# Altium PCB PCB_2020-11-14_13-49-03_2020-11-14_14-20-30.pcbdoc
Units mil, origin at the board's own origin, x right, y up, seen from the top; angles counter-clockwise.
Board outline 5264.59 x 3892.5 mil, 2 copper layers (Top Layer, Bottom Layer); 6 components, 25 nets, 12 pads, 42 vias.
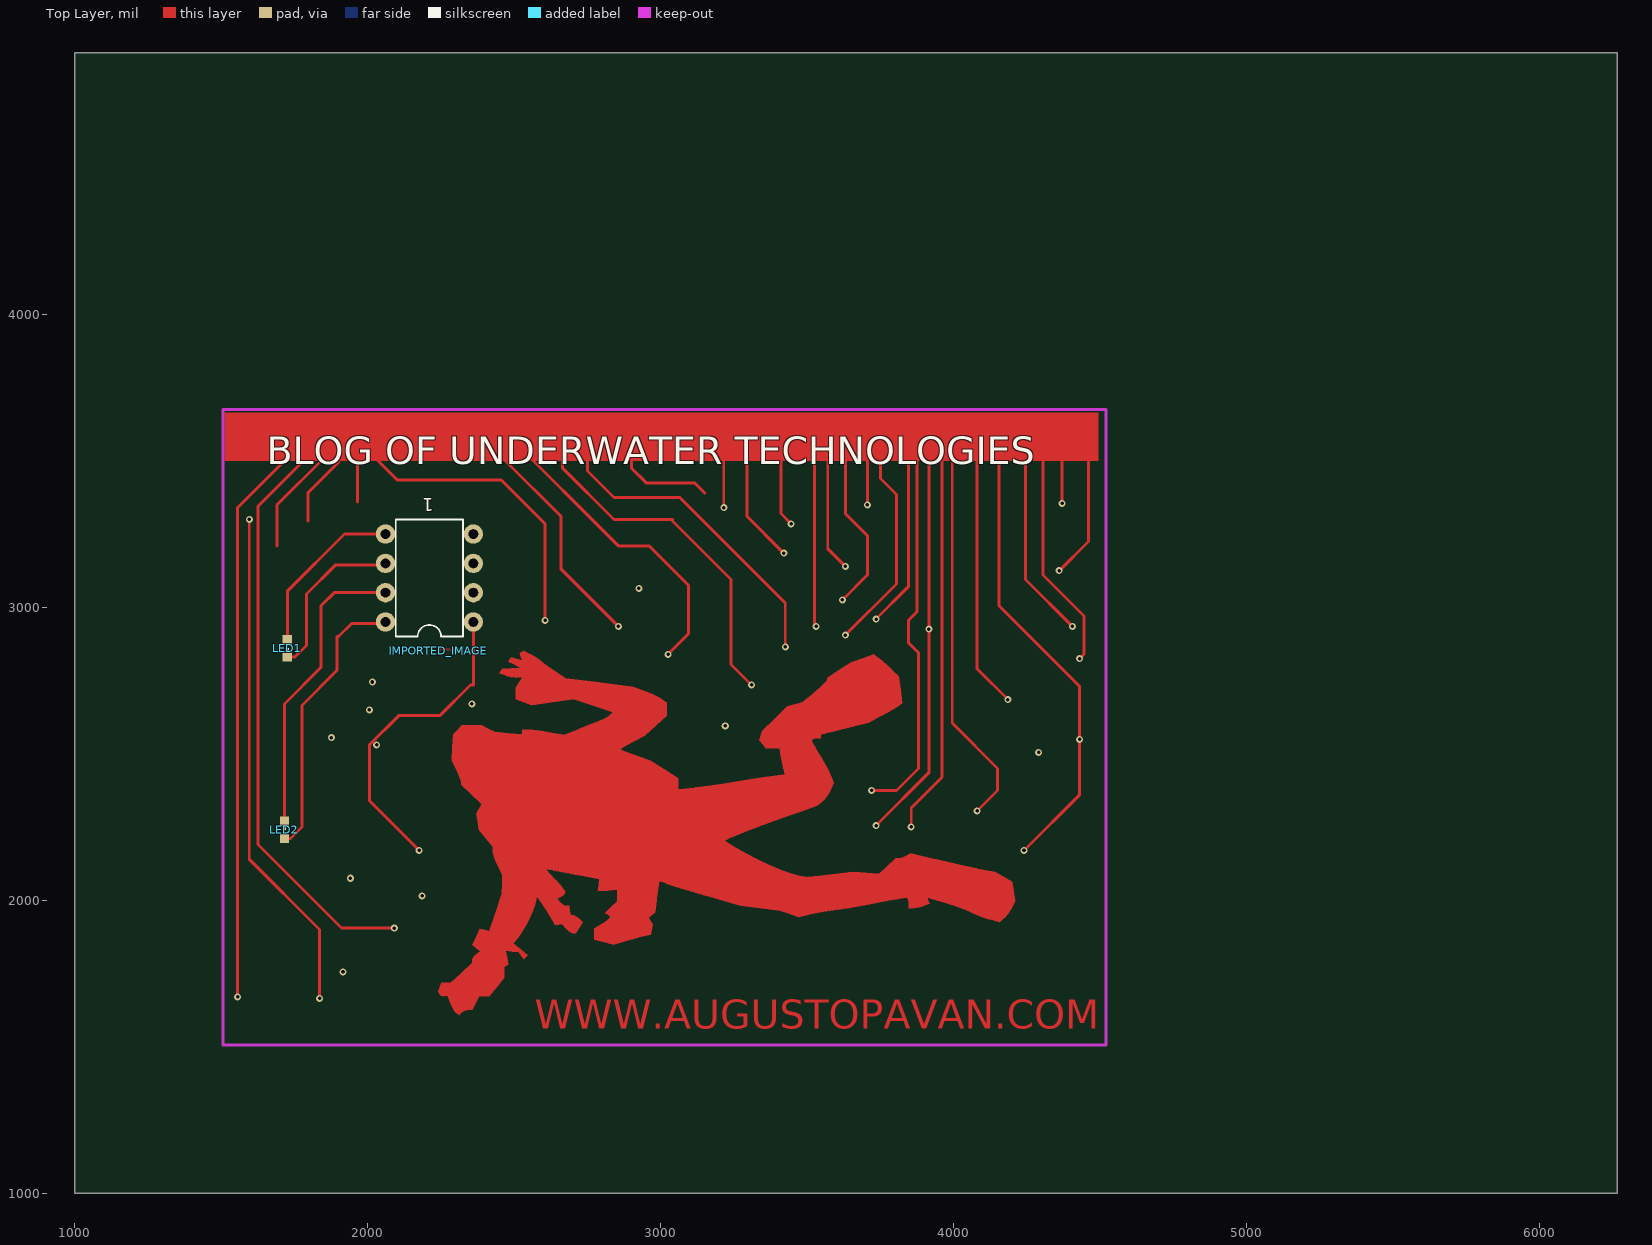
[diagram p0: Top Layer view]
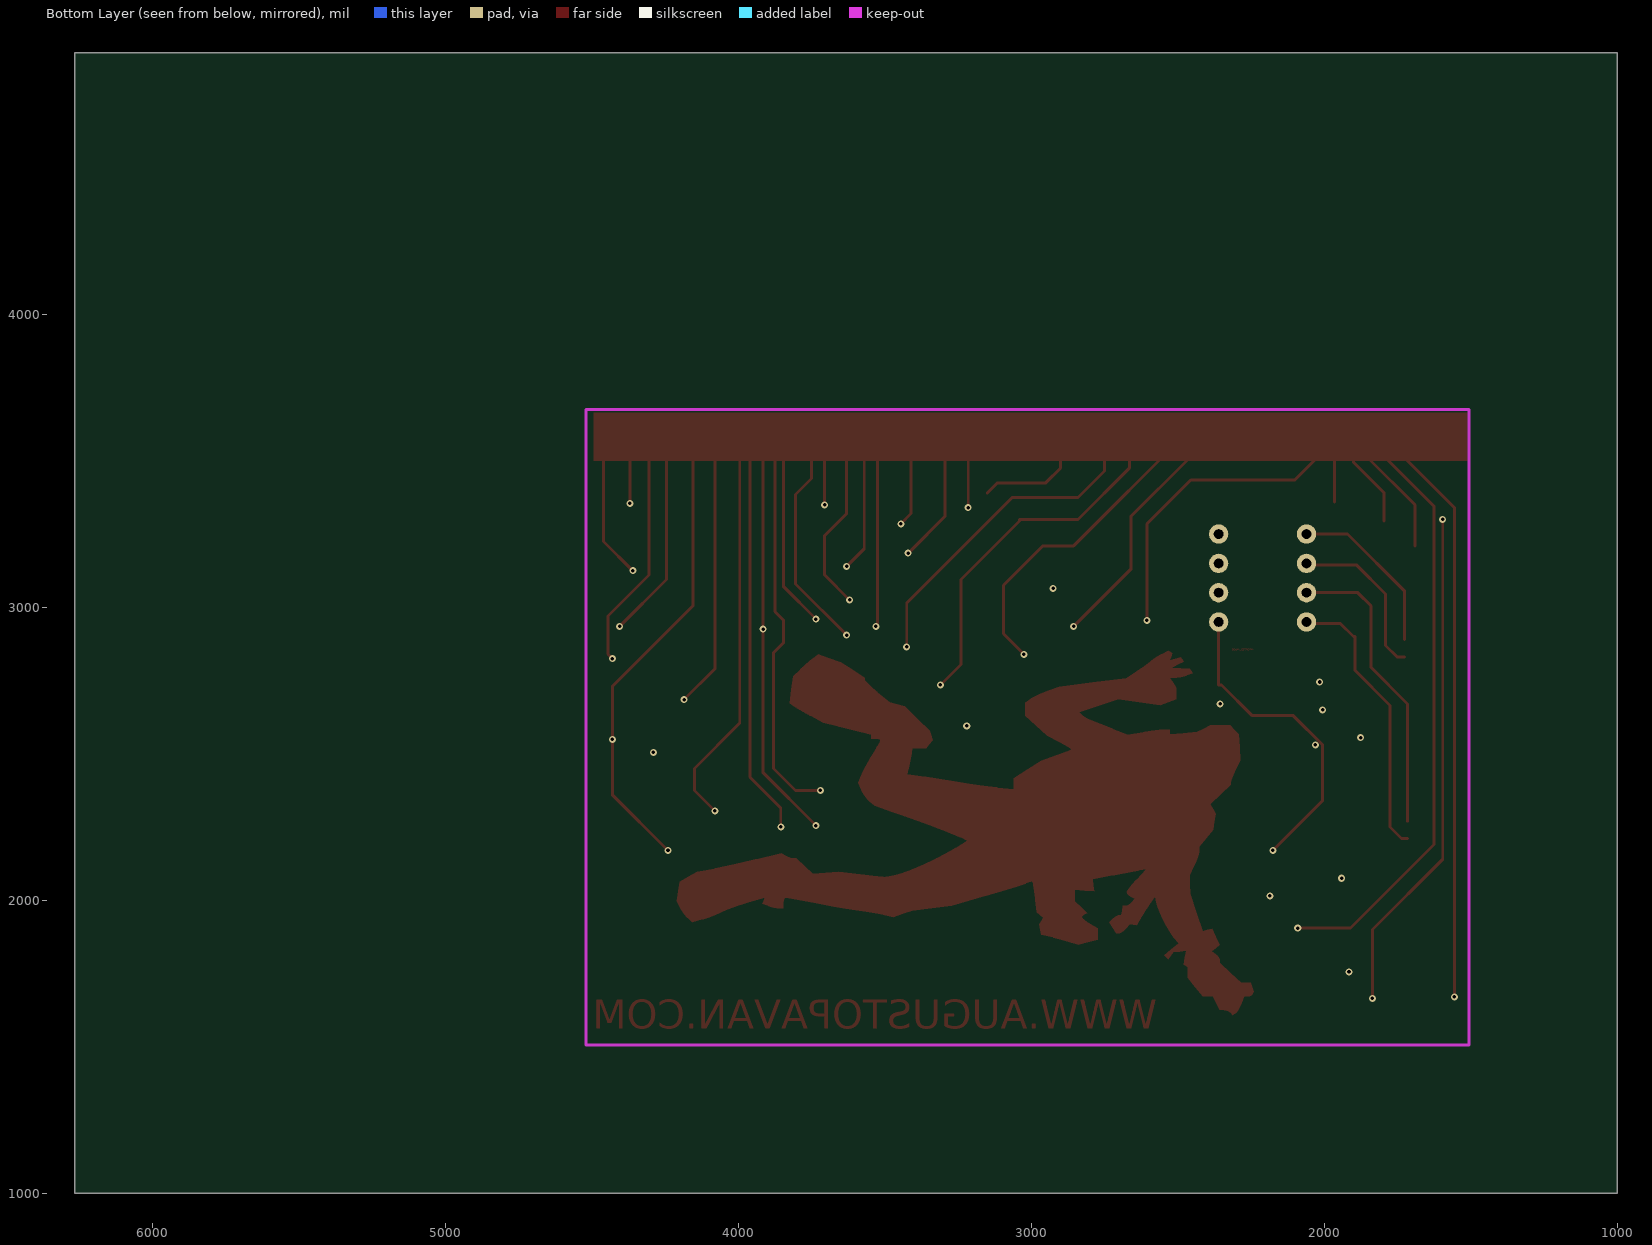
[diagram p1: Bottom Layer view, seen from below]

## Layer stack, top to bottom
Top Layer: signal copper (thickness not stored)
Dielectric: dielectric 12.6, FR-4, Dk 4.8
Bottom Layer: signal copper (thickness not stored)

## Board outline
6264.59,1000 1000,1000 1000,4892.5 6264.59,4892.5

## Components (designator, comment, footprint, x,y, rotation, side; value= is the part's Value field where it differs from the comment)
1 "DS1302" DIL08-ROUND 2210,3100 r90 top
IMPORTED_IMAGE "IMPORTED_IMAGE" IMPORTED_IMAGE 2239.84,2851.91 r0 top
LED1 "LEDCHIPLED_0603" CHIPLED_0603 1725,2860 r180 top
LED2 "LEDCHIPLED_0603" CHIPLED_0603 1715,2240 r0 top
? "" ? 5133.8,2595 r0 top
? "" ? 3007.5,4032.62 r0 top

## Footprints (in the part's own frame and the unit in brackets; to place one, negate y for a bottom-side part, rotate by r counter-clockwise, add the part's x,y. Pads: shape width x height; smd on the part's side, far side on the other; paste and mask are expansions set on the pad)
CHIPLED_0603 [mil]
  rect 31.5x31.5 smd: A(0,-29.53) C(0,29.53)
  silkscreen extent -5,0 5,10
DIL08-ROUND [mil]
  round 66 hole 32 slot 32.2 at 90 deg: 1(-150,-150) 2(-50,-150) 3(50,-150) 4(150,-150) 5(150,150) 6(50,150) 7(-50,150) 8(-150,150)
  silkscreen extent -200,-115 200,115
IMPORTED_IMAGE [mil]
  Top Layer region: 4787 vertices and 7 holes, not listed, extent 0,-1243.81 1970.32,0
? [mil]

## Via types
v1: diameter 24, hole 12, Top Layer to Bottom Layer, 42 vias

## Nets (pads, with @x,y where several pads share a name; then routed paths per layer and width w, separated by ;. In a path a pad name is that pad's centre, name@x,y a point inside that pad or via, vN(x,y) a via of type N, cw(c..) or ccw(c..) an arc to the next point about the centre after c; other vN are vias at no path point)
1_1: 1.1 | length 1085.3
  Top Layer w10: v1(2175,2170) 2005,2340 2005,2530 2105,2630 2245,2630 2350,2735 2360,2735 1.1
1_3: 1.3
1_4: 1.4
1_5: 1.5 LED1.A | length 581.2
  Top Layer w10: LED1.A 1725,3055 1920,3250 1.5
1_6: 1.6 LED1.C | length 569.9
  Top Layer w10: LED1.C 1750.47,2830.47 1790,2870 1790,3045 1890,3145 2055,3145 1.6
1_7: 1.7 LED2.C | length 1025.9
  Top Layer w10: LED2.C 1715,2670 1840,2795 1840,3005 1885,3050 1.7
1_8: 1.8 LED2.A | length 961.8
  Top Layer w10: LED2.A 1735.47,2210.47 1775,2250 1775,2665 1895,2785 1895,2900 1900,2900 1945,2945 2055,2945 1.8
S$323:  | length 4243.8
  Top Layer w10: v1(1555,1670) 1555,3340 1830,3615 1895,3615 1625,3345 1625,2190 1910,1905 v1(2090,1905)
S$326:  | length 1734.4
  Top Layer w10: v1(1595,3300) 1595,2140 1835,1900 v1(1835,1665)
S$328:  | length 1153.9
  Top Layer w10: 1975,3640 1975,3560 2100,3435 2455,3435 2605,3285 v1(2605,2955)
S$330:  | length 1008.1
  Top Layer w10: 2295,3635 2295,3545 2335,3505 2465,3505 2660,3310 2660,3130 v1(2855,2935)
S$332:  | length 1144.4
  Top Layer w10: 2475,3630 2475,3590 2855,3210 2960,3210 3095,3075 3095,2910 v1@3020,2835
  other v1: 3024.64,2839.64
S$334:  | length 1244.3
  Top Layer w10: 2665,3595 2665,3475 2840,3300 3040,3300 3040,3295 3240,3095 3240,2805 v1(3310,2735)
S$336:  | length 1637.6
  Top Layer w10: 4155,3615 4155,3005 4430,2730 v1(4430,2549.47) 4430,2360 v1(4240,2170)
S$338:  | length 963.5
  Top Layer w10: 4080,3605 4080,2790 v1(4185,2685)
S$340:  | length 1296.1
  Top Layer w10: 3995,3515 3995,2605 4150,2450 4150,2375 4085,2310
S$342:  | length 1419.6
  Top Layer w10: v1(3735,2255) 3915,2435 v1(3915,2925.79) 3915,3600
S$344:  | length 651.3
  Top Layer w10: 4245,3520 4245,3095 v1(4405,2935)
S$352:  | length 1106.4
  Top Layer w10: 2750,3570 2750,3465 2840,3375 3065,3375 3425,3015 3425,2875
S$354:  | length 275
  Top Layer w10: v1(3215,3340) 3215,3615
S$356:  | length 399.7
  Top Layer w10: 3295,3540 3295,3310 3415,3190
S$358:  | length 635
  Top Layer w10: 3525,2940 3525,3575
S$471:  | length 1323.5
  Top Layer w10: v1(3855,2250) 3855,2315 3960,2420 3960,3530
S$473:  | length 1343
  Top Layer w10: v1(3720,2375) 3805,2375 3880,2450 3880,2845 3845,2880 3845,2955 3875,2985 3875,3575
S$491:  | length 5267.1
  Top Layer w10: 1690,3210 1690,3350 1850,3510 1850,3515 ; 1795,3295 1795,3390 1900,3495 1900,3525 ; 1965,3360 1965,3520 ; 2900,3525 2900,3475 2950,3425 3115,3425 3150,3390 ; 3410,3515 3410,3320 v1(3445,3285) ; 3570,3530 3570,3200 v1(3630,3140) ; v1(3620,3025) 3705,3110 3705,3245 3630,3320 3630,3525 ; v1(3630,2905) 3805,3080 3805,3385 3750,3440 3750,3535 ; v1(3705,3350) 3705,3525 ; v1(3735,2960) 3845,3070 3845,3520 ; 4305,3540 4305,3110 4445,2970 4445,2840 v1(4430,2825) ; v1(4360,3125) 4460,3225 4460,3525 ; v1(4370,3355) 4370,3530
pads on no net: 1.2
copper on no net:
  other v1: 1915,1755 2185,2015 1940,2075 4080,2305 4290,2505 2030,2530 1875,2555 3220,2595 2005,2650 2355,2670 2015,2745 3425,2865 3530,2935 2925,3065 3420,3185

## Other copper
Top Layer:
  rectangle net S$491: 1510,3500 4495,3665
  text "WWW.AUGUSTOPAVAN.COM" at 2570,1560.79 h98.42

## Silkscreen, mask and mechanical layers (free items; w line width, h text height)
Top Overlay:
  text "BLOG OF UNDERWATER TECHNOLOGIES" at 1655,3487.76 h94.49